# Altium PCB IDE_44m_to_44m.PcbDoc
Units mm, origin at the board's own origin, x right, y up, seen from the top; angles counter-clockwise.
Board outline 49.07 x 49.28 mm, 2 copper layers (Top Layer, Bottom Layer), stack 1.594 mm thick; 2 components, 35 nets, 88 pads, 53 vias.
Unrouted connection lines stored in the file: 36.
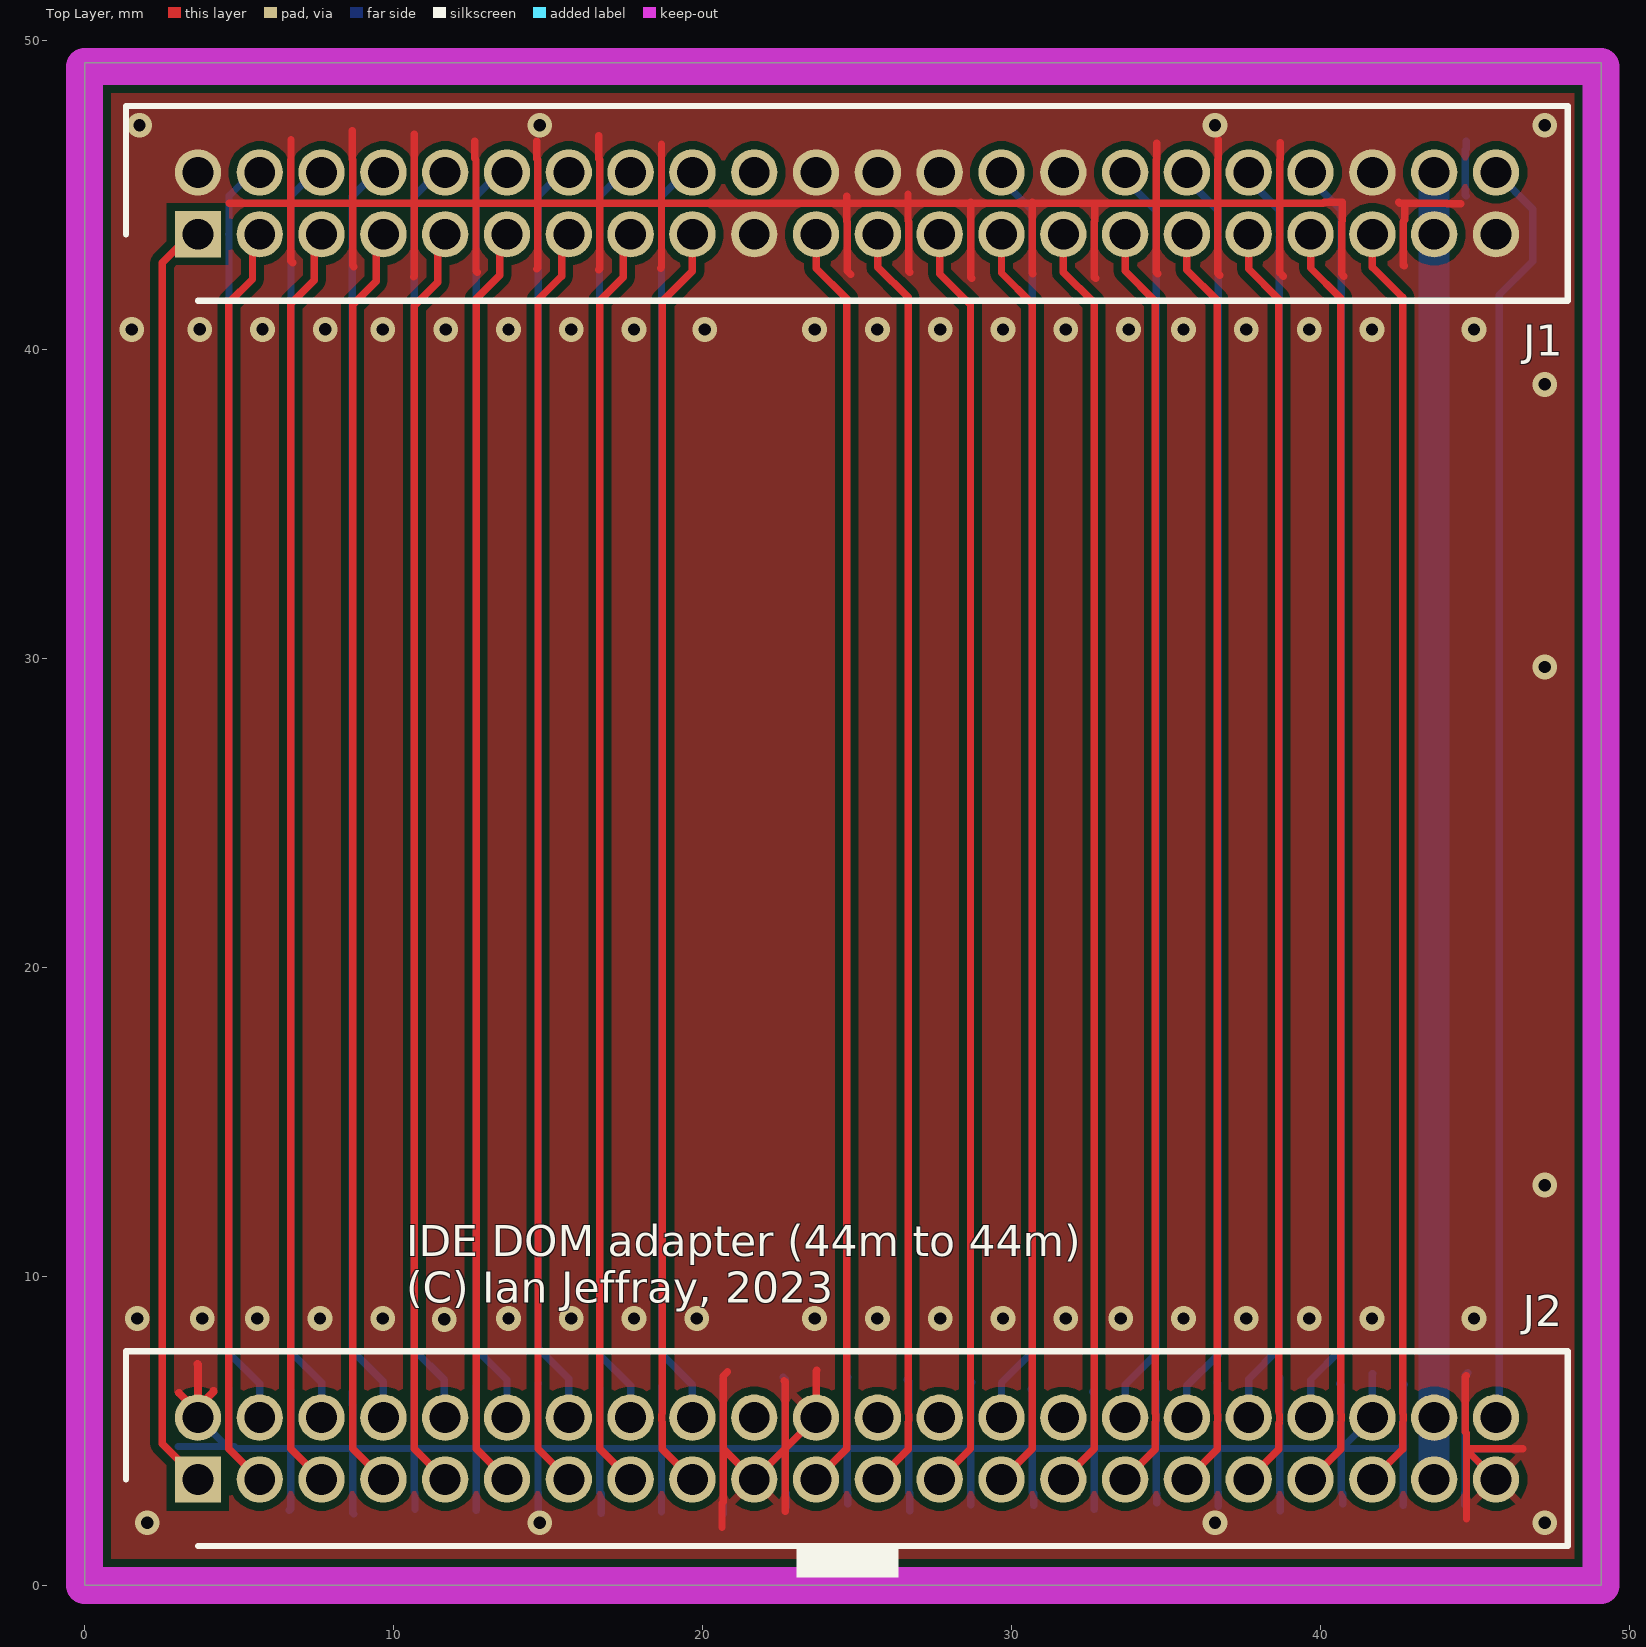
[diagram p0: Top Layer view]
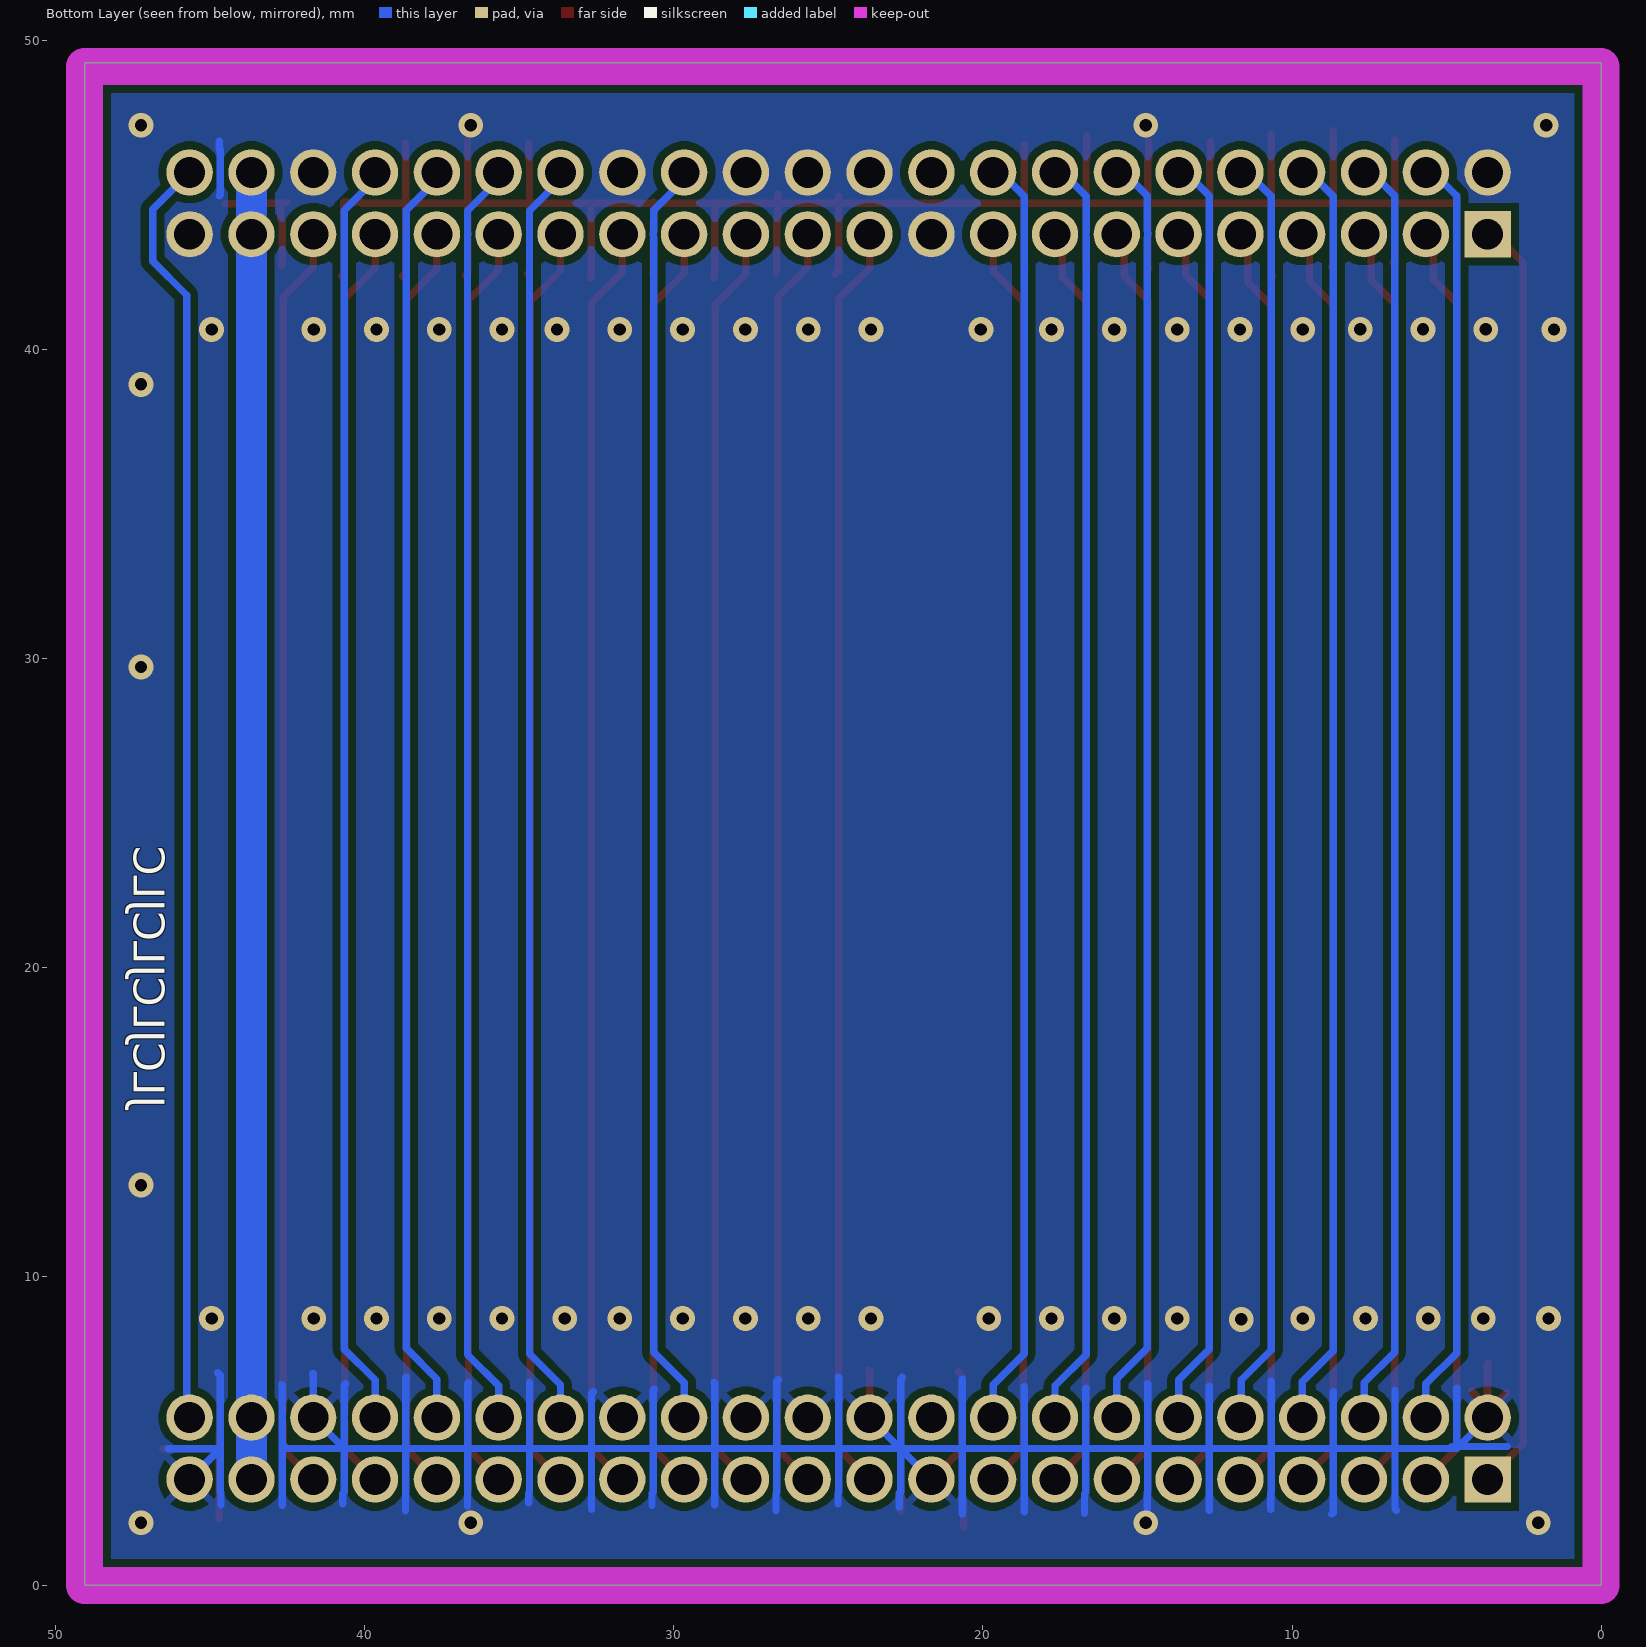
[diagram p1: Bottom Layer view, seen from below]

## Layer stack, top to bottom
Top Solder: solder mask 0.0102, Solder Resist, Dk 3.5
Top Layer: signal copper 0.035
Dielectric 1: dielectric 1.524, FR-4, Dk 4.8
Bottom Layer: signal copper 0.035
Bottom Solder: solder mask 0.0102, Solder Resist, Dk 3.5

## Board outline
0,49.276 49.069,49.276 49.069,0 0,0

## Design rules (kind name [scope] priority, off if disabled: settings)
Clearance [All] p1: gap=0.254 ignorepadtopadclearanceinfootprint=FALSE except(0: Arc-Hole Track-Hole SMDPad-Hole THPad-Hole Via-Hole Fill-Hole Poly-Hole Region-Hole Text-Hole; 0.127: Arc-Arc Arc-Track Arc-THPad Track-Track Track-THPad)
ComponentClearance [All] p1: gap=0.127 collisioncheckmode=3 verticalgap=0.254 showdistances=FALSE
PolygonConnect [All] p1: connectstyle=Direct reliefconductorwidth=0.254 reliefentries=4 polygonreliefangle="90 Angle" airgapwidth=0.254
RoutingVias [All] p1: holewidth=0.711 width=1.27 viastyle="Through Hole" minholewidth=0.711 minwidth=1.27 maxholewidth=0.711 maxwidth=1.27
SolderMaskExpansion [All] p1: expansion=0.102 istentingtop=FALSE
Width [All] p1: maxlimit=0.254 minlimit=0.127 preferedwidth=0.254 minimp=50.000000 maximp=50.000000 favimp=50.000000
29 further rules are at their usual default settings.

## Classes and differential pairs
component class IDE_44m_to_44m: J11

## Components (designator, comment, footprint, x,y, rotation, side; value= is the part's Value field where it differs from the comment)
J1 "87831-4420" SHDR44W55P200_2X22_4665X630X640P 3.669,43.72 r0 top locked value="44pin male 2mm"
J2 "87831-4420" SHDR44W55P200_2X22_4665X630X640P 3.669,3.429 r0 top locked value="44pin male 2mm"

## Footprints (in the part's own frame and the unit in brackets; to place one, negate y for a bottom-side part, rotate by r counter-clockwise, add the part's x,y. Pads: shape width x height; smd on the part's side, far side on the other; paste and mask are expansions set on the pad)
SHDR44W55P200_2X22_4665X630X640P [mm]
  rect 1.5x1.5 hole 1: 1(0,0)
  round 1.5 hole 1: 2(0,2) 3(2,0) 4(2,2) 5(4,0) 6(4,2) 7(6,0) 8(6,2) 9(8,0) 10(8,2) 11(10,0) 12(10,2) 13(12,0) 14(12,2) 15(14,0) 16(14,2) 17(16,0) 18(16,2) 19(18,0) 20(18,2) 21(20,0) 22(20,2) 23(22,0) 24(22,2) 25(24,0) 26(24,2) 27(26,0) 28(26,2) 29(28,0) 30(28,2) 31(30,0) 32(30,2) 33(32,0) 34(32,2) 35(34,0) 36(34,2) 37(36,0) 38(36,2) 39(38,0) 40(38,2) 41(40,0) 42(40,2) 43(42,0) 44(42,2)
  silkscreen extent -2.32,-2.15 44.32,4.15, body extent -2.32,-2.15 44.33,4.15, height 6.2

## Part data
J1 J2: "Drive connector", Manufacturer_Name=Molex, Mouser Part Number=538-87831-4420, Datasheet Link=https://datasheet.datasheetarchive.com/originals/distributors/Datasheets-DGA22/2095109.pdf, Height=6.4mm, Manufacturer_Part_Number=87831-4420, Mouser Price/Stock=https://www.mouser.co.uk/ProductDetail/Molex/87831-4420?qs=tYx%252BZc2nXqqGnHzye8Wn9w%3D%3D

## Via types
v1: diameter 0.8, hole 0.4, Top Layer to Bottom Layer, tented both sides, 53 vias

## Nets (pads, with @x,y where several pads share a name; then routed paths per layer and width w, separated by ;. In a path a pad name is that pad's centre, name@x,y a point inside that pad or via, vN(x,y) a via of type N, cw(c..) or ccw(c..) an arc to the next point about the centre after c; other vN are vias at no path point)
A0: J1.35 J2.35 | length 41.1
  Top Layer w0.24: J2.35 38.646,4.406 38.646,5.209 cw(c38.886,5.207) 38.65,5.25 ccw(c37.669,5.429) 38.65,5.609 cw(c38.886,5.651) 38.646,5.649 38.646,41.618 37.669,42.595 J1.35
A1: J1.33 J2.33 | length 41.1
  Top Layer w0.24: J2.33 36.646,4.406 36.646,5.209 cw(c36.886,5.207) 36.65,5.25 ccw(c35.669,5.429) 36.65,5.609 cw(c36.886,5.651) 36.646,5.649 36.646,41.586 35.669,42.563 J1.33
A2: J1.36 J2.36 | length 41.2
  Bottom Layer w0.24: J1.36@37.434,45.72 38.659,44.495 38.659,43.84 cw(c37.669,43.72) 38.659,43.6 38.659,7.671 37.669,6.681 J2.36
ACTIVEn: J1.39 J2.39 | length 41.1
  Top Layer w0.24: J2.39 42.646,4.406 42.646,5.209 cw(c42.886,5.207) 42.65,5.25 ccw(c41.669,5.429) 42.65,5.609 cw(c42.886,5.651) 42.646,5.649 42.646,41.682 41.669,42.659 J1.39
ALE: J1.28 J2.28 | length 41.2
  Bottom Layer w0.24: J1.28@29.434,45.72 30.658,44.496 30.658,43.848 cw(c29.669,43.72) 30.658,43.592 30.658,7.544 29.669,6.555 J2.28
CS0n: J1.37 J2.37 | length 41.1
  Top Layer w0.24: J2.37 40.646,4.406 40.646,5.209 cw(c40.886,5.207) 40.65,5.25 ccw(c39.669,5.429) 40.65,5.609 cw(c40.886,5.651) 40.646,5.649 40.646,41.65 39.669,42.627 J1.37
CS1n: J1.38 J2.38 | length 41.2
  Bottom Layer w0.24: J1.38@39.434,45.72 40.595,44.559 40.665,44.489 40.665,43.755 cw(c39.669,43.72) 40.665,43.685 40.665,7.645 39.669,6.649 J2.38
D0: J1.17 J2.17 | length 41.1
  Top Layer w0.24: J2.17 18.692,4.406 18.692,5.207 ccw(c18.452,5.207) 18.688,5.252 cw(c19.669,5.429) 18.688,5.609 ccw(c18.452,5.651) 18.692,5.651 18.692,41.552 19.669,42.529 J1.17
D1: J1.15 J2.15 | length 41
  Top Layer w0.24: J1.15@17.434,43.72 17.434,42.326 16.672,41.564 16.672,4.426 J2.15
D2: J1.13 J2.13 | length 41
  Top Layer w0.24: J1.13@15.434,43.72 15.434,42.358 14.672,41.596 14.672,4.426 J2.13
D3: J1.11 J2.11 | length 41
  Top Layer w0.24: J1.11@13.434,43.72 13.434,42.39 12.672,41.628 12.672,4.426 J2.11
D4: J1.9 J2.9 | length 41
  Top Layer w0.24: J1.9@11.434,43.72 11.434,42.168 10.672,41.406 10.672,4.426 J2.9
D5: J1.7 J2.7 | length 41
  Top Layer w0.24: J1.7@9.434,43.72 9.434,42.2 8.672,41.438 8.672,4.426 J2.7
D6: J1.5 J2.5 | length 41
  Top Layer w0.24: J1.5@7.434,43.72 7.434,42.232 6.672,41.47 6.672,4.426 J2.5
D7: J1.3 J2.3 | length 41
  Top Layer w0.24: J1.3@5.434,43.72 5.434,42.264 4.672,41.502 4.672,4.426 J2.3
D8: J1.4 J2.4 | length 41
  Bottom Layer w0.24: J1.4@5.434,45.72 4.674,44.96 4.674,43.776 ccw(c5.669,43.72) 4.674,43.664 4.674,7.518 5.669,6.523 J2.4
D9: J1.6 J2.6 | length 41
  Bottom Layer w0.24: J1.6@7.434,45.72 6.68,44.966 6.68,43.848 ccw(c7.669,43.72) 6.68,43.592 6.68,7.544 7.669,6.555 J2.6
D10: J1.8 J2.8 | length 41
  Bottom Layer w0.24: J1.8@9.434,45.72 8.661,44.947 8.661,43.816 cw(c7.669,43.72) 8.661,43.624 8.661,7.595 9.669,6.587 J2.8
D11: J1.10 J2.10 | length 41
  Bottom Layer w0.24: J1.10@11.434,45.72 10.668,44.954 10.668,7.62 11.636,6.652 11.636,5.462 J2.10
D12: J1.12 J2.12 | length 41
  Bottom Layer w0.24: J1.12@13.434,45.72 12.675,44.961 12.675,43.792 ccw(c13.669,43.72) 12.675,43.648 12.675,7.645 13.669,6.651 J2.12
D13: J1.14 J2.14 | length 41
  Bottom Layer w0.24: J1.14@15.434,45.72 14.681,44.967 14.681,43.855 ccw(c15.669,43.72) 14.681,43.585 14.681,7.671 15.669,6.683 J2.14
D14: J1.16 J2.16 | length 41
  Bottom Layer w0.24: J1.16@17.434,45.72 16.662,44.948 16.662,43.805 cw(c15.669,43.72) 16.662,43.635 16.662,7.468 17.669,6.461 J2.16
D15: J1.18 J2.18 | length 41
  Bottom Layer w0.24: J1.18@19.434,45.72 18.669,44.955 18.669,7.493 19.669,6.493 J2.18
DMACKn: J1.29 J2.29 | length 41.1
  Top Layer w0.24: J2.29 32.666,4.426 32.666,41.502 31.671,42.497 31.671,43.718 J1.29
DMARQ: J1.21 J2.21 | length 41.1
  Top Layer w0.24: J2.21 24.666,4.426 24.666,41.628 23.669,42.625 J1.21
GND: J1.2 J1.19 J1.22 J1.24 J1.26 J1.30 J1.40 J1.43 J2.2 J2.19 J2.22 J2.24 J2.26 J2.30 J2.40 J2.43 | length 259.2
  Top Layer w0.24: 4.673,44.724 4.674,44.723 6.672,44.723 ; 6.68,46.787 6.68,46.141 6.672,46.133 6.672,44.723 ; 6.731,42.799 6.672,42.858 6.672,44.723 ; 8.661,47.066 8.661,46.138 8.672,46.127 8.672,44.723 ; 8.712,42.672 8.672,42.712 8.672,44.723 ; 10.643,42.342 10.668,42.367 10.668,44.723 ; 10.668,46.965 10.668,44.723 ; 12.624,46.736 12.624,46.175 12.666,46.133 12.666,44.723 ; 12.7,42.494 12.666,42.528 12.666,44.723 ; 14.63,42.596 14.666,42.631 14.666,44.723 ; 14.63,46.736 14.63,46.169 14.666,46.133 14.666,44.723 ; 16.637,42.57 16.666,42.599 16.666,44.723 ; 16.637,46.914 16.637,46.162 16.666,46.133 16.666,44.723 ; 18.644,42.621 18.669,42.647 18.669,44.723 ; 18.669,46.634 18.669,44.723 ; 20.625,1.877 20.625,2.667 20.672,2.714 20.672,4.426 ; 20.803,6.909 20.672,6.778 20.672,4.426 ; 22.631,6.629 22.666,6.595 22.666,4.426 ; 22.666,2.402 22.666,4.426 ; 23.698,6.96 23.669,6.93 J2.22 22.666,4.426 ; 24.663,44.958 24.663,44.723 ; 24.79,42.418 24.672,42.536 24.672,44.127 24.663,44.136 24.663,44.723 ; 26.645,45.009 26.645,44.723 ; 26.695,42.494 26.67,42.52 26.67,44.129 26.645,44.154 26.645,44.723 ; 28.677,44.755 28.677,44.723 ; 28.702,42.291 28.672,42.321 28.672,44.133 28.677,44.138 28.677,44.723 ; 30.658,44.755 30.658,44.723 ; 30.683,42.443 30.67,42.456 30.67,44.128 30.658,44.141 30.658,44.723 ; 32.69,44.653 32.69,44.151 32.672,44.133 32.672,42.334 32.715,42.291 ; 34.696,46.66 34.696,46.157 34.672,46.133 34.672,44.723 ; 34.722,42.443 34.672,42.493 34.672,44.723 ; 36.678,46.787 36.678,46.139 36.672,46.133 36.672,44.723 ; 36.728,42.393 36.672,42.449 36.672,44.723 ; 38.684,46.685 38.684,46.145 38.672,46.133 38.672,44.723 ; 38.786,42.367 38.672,42.481 38.672,44.723 ; 40.742,42.367 40.672,42.437 40.672,44.133 40.691,44.152 40.691,44.755 40.114,44.755 40.082,44.723 38.672,44.723 ; 42.52,44.755 42.551,44.723 44.076,44.723 44.095,44.704 44.526,44.704 ; 42.697,42.697 42.672,42.723 42.672,44.133 42.723,44.184 42.723,44.704 ; 44.704,6.782 44.672,6.75 44.672,4.978 44.716,4.934 44.716,4.42 ; 44.716,2.159 44.716,4.382 ; J2.43 44.716,4.382 ; 46.533,4.42 44.716,4.42 ; 6.672,44.723 8.672,44.723 ; 8.672,44.723 10.668,44.723 ; 10.668,44.723 12.666,44.723 ; 12.666,44.723 14.666,44.723 ; 14.666,44.723 16.666,44.723 ; 16.666,44.723 18.669,44.723 ; 18.669,44.723 24.663,44.723 ; 20.672,4.426 J2.19 22.666,4.426 ; 24.663,44.723 26.645,44.723 ; 26.645,44.723 28.677,44.723 ; 28.677,44.723 30.658,44.723 ; 30.658,44.723 34.672,44.723 ; 34.672,44.723 36.672,44.723 ; 36.672,44.723 38.672,44.723 ; 44.716,4.382 44.716,4.42
  Top Layer w0.254: 3.053,6.232 J2.2@3.669,5.616 ; 3.658,7.163 3.669,7.151 J2.2@3.669,5.766 ; J2.2 J2.2@3.669,5.616 ; 4.171,6.299 4.171,6.268 J2.2@3.669,5.766 ; J2.2@3.669,5.616 J2.2@3.669,5.766
  Bottom Layer w0.24: 3.026,4.495 4.603,4.495 ; J2.2 4.603,4.495 ; 4.674,6.375 4.674,5.844 4.666,5.836 4.666,4.495 ; 6.629,2.438 6.669,2.478 6.669,4.432 ; 6.669,6.325 6.669,4.432 ; 8.661,6.274 8.661,5.847 8.672,5.836 8.672,4.432 ; 8.712,2.311 8.672,2.352 8.672,4.432 ; 10.668,6.604 10.668,4.432 ; 10.693,2.464 10.693,2.995 10.668,3.02 10.668,4.432 ; 12.675,2.438 12.675,3.013 12.672,3.016 12.672,4.432 ; 12.675,6.452 12.672,6.449 12.672,4.432 ; 14.681,2.438 14.681,3.007 14.672,3.016 14.672,4.432 ; 14.681,6.528 14.672,6.519 14.672,4.432 ; 16.662,6.375 16.672,6.366 16.672,4.432 ; 16.713,2.337 16.713,2.975 16.672,3.016 16.672,4.432 ; 18.669,2.388 18.669,4.432 ; 18.669,6.426 18.669,4.432 ; 20.676,2.311 20.676,4.432 ; 20.676,6.68 20.672,6.677 20.672,4.496 20.676,4.492 20.676,4.432 ; J2.19 22.666,4.426 ; 22.606,6.731 22.666,6.671 22.666,4.432 ; 22.708,2.54 22.708,2.98 22.666,3.022 22.666,4.426 ; J2.22 22.672,4.432 ; 24.689,2.642 24.689,2.999 24.672,3.016 24.672,4.432 ; 24.689,6.731 24.672,6.714 24.672,4.432 ; 26.619,6.655 26.666,6.608 26.666,4.432 ; 26.695,2.413 26.695,2.993 26.666,3.022 26.666,4.432 ; 28.677,2.616 28.677,3.011 28.672,3.016 28.672,4.432 ; 28.702,6.579 28.672,6.549 28.672,4.432 ; 30.632,6.35 30.67,6.312 30.67,4.432 ; 30.709,2.591 30.709,2.979 30.67,3.018 30.67,4.432 ; 32.614,6.274 32.666,6.221 32.666,4.432 ; 32.664,2.464 32.664,3.014 32.666,3.016 32.666,4.432 ; 34.671,6.579 34.671,4.432 ; 34.696,2.667 34.696,2.992 34.671,3.017 34.671,4.432 ; 36.652,6.553 36.666,6.539 36.666,4.432 ; 36.678,2.565 36.678,3.01 36.666,3.022 36.666,4.432 ; 38.659,6.731 38.671,6.718 38.671,4.432 ; 38.684,2.413 38.684,3.004 38.671,3.017 38.671,4.432 ; 40.615,6.528 40.666,6.476 40.666,4.432 ; 40.716,2.642 40.716,2.972 40.666,3.022 40.666,4.432 ; 41.681,6.858 41.669,6.846 J2.40 40.672,4.432 ; 42.672,2.591 42.672,4.573 ; 42.697,6.502 42.672,6.477 42.672,4.573 ; 44.653,2.616 44.653,3.003 44.672,3.022 44.672,4.42 ; 44.704,44.958 44.672,44.99 44.672,46.45 44.704,46.482 44.704,46.736 ; 44.755,6.883 44.672,6.801 44.672,4.42 ; J2.43 44.678,4.42 ; 46.362,4.421 44.68,4.421 44.678,4.42 ; 4.603,4.495 4.666,4.432 ; 4.603,4.495 4.666,4.495 ; 4.666,4.432 4.666,4.495 ; 4.666,4.432 4.902,4.432 ; 4.666,4.495 4.839,4.495 4.902,4.432 ; 4.902,4.432 6.669,4.432 ; 6.669,4.432 8.672,4.432 ; 8.672,4.432 10.668,4.432 ; 10.668,4.432 12.672,4.432 ; 12.672,4.432 14.672,4.432 ; 14.672,4.432 16.672,4.432 ; 16.672,4.432 18.669,4.432 ; 18.669,4.432 20.676,4.432 ; 20.676,4.432 22.666,4.432 ; 22.666,4.426 22.672,4.432 ; 22.666,4.426 22.666,4.432 ; 22.666,4.432 22.672,4.432 ; 22.672,4.432 24.672,4.432 ; 24.672,4.432 26.666,4.432 ; 26.666,4.432 28.672,4.432 ; 28.672,4.432 30.67,4.432 ; 30.67,4.432 32.666,4.432 ; 32.666,4.432 34.671,4.432 ; 34.671,4.432 36.666,4.432 ; 36.666,4.432 38.671,4.432 ; 38.671,4.432 40.666,4.432 ; 40.666,4.432 40.672,4.432 ; 40.672,4.432 42.531,4.432 42.672,4.573 ; 44.672,4.42 44.678,4.42
  other v1: 2.032,2.032 14.732,2.032 36.576,2.032 47.244,2.032 11.642,8.609 1.702,8.636 3.81,8.636 5.588,8.636 7.62,8.636 9.652,8.636 13.716,8.636 15.748,8.636 17.78,8.636 19.812,8.636 23.622,8.636 25.654,8.636 27.686,8.636 29.718,8.636 31.75,8.636 33.528,8.636 35.56,8.636 37.592,8.636 39.624,8.636 41.656,8.636 44.958,8.636 47.244,12.954 47.244,29.718 47.244,38.862 1.524,40.64 3.728,40.641 5.76,40.641 7.792,40.641 9.652,40.64 11.684,40.64 13.716,40.64 15.748,40.64 17.78,40.64 20.066,40.64 23.622,40.64 25.654,40.64 27.686,40.64 29.718,40.64 31.75,40.64 33.782,40.64 35.56,40.64 37.592,40.64 39.624,40.64 41.656,40.64 44.958,40.64 1.778,47.244 14.732,47.244 36.576,47.244 47.244,47.244
IO_CH_RDY: J1.27 J2.27 | length 41.1
  Top Layer w0.24: J2.27 30.666,4.426 30.666,41.47 29.669,42.467 J1.27
IOCS16n: J1.32 J2.32 | length 41.2
  Bottom Layer w0.24: J1.32@33.434,45.72 34.671,44.483 34.671,7.493 33.669,6.491 J2.32
IORn: J1.25 J2.25 | length 41.1
  Top Layer w0.24: J2.25 28.666,4.426 28.666,41.438 27.669,42.435 J1.25
IOWn: J1.23 J2.23 | length 41.1
  Top Layer w0.24: J2.23 26.646,4.406 26.646,5.209 cw(c26.886,5.207) 26.65,5.25 ccw(c25.669,5.429) 26.65,5.609 cw(c26.886,5.651) 26.646,5.649 26.646,41.68 25.669,42.657 J1.23
IRQr: J1.31 J2.31 | length 41.1
  Top Layer w0.24: J2.31 34.646,4.406 34.646,5.209 cw(c34.886,5.207) 34.65,5.25 ccw(c33.669,5.429) 34.65,5.609 cw(c34.886,5.651) 34.646,5.649 34.646,41.554 33.669,42.531 J1.31
PDIAGn: J1.34 J2.34 | length 41.2
  Bottom Layer w0.24: J1.34@35.434,45.72 36.678,44.476 36.678,43.826 ccw(c37.669,43.72) 36.678,43.614 36.678,7.468 35.669,6.459 J2.34
RESETn: J1.1 J2.1 | length 41.1
  Top Layer w0.24: J1.1@3.434,43.72 2.515,42.801 2.515,4.583 J2.1
Type: J1.44 J2.44 | length 41.3
  Bottom Layer w0.24: J2.44 45.768,5.528 45.768,41.755 46.863,42.85 46.863,43.137 46.863,44.526 J1.44
VCC: J1.41 J1.42 J2.41 J2.42 | length 42.3
  Bottom Layer w1: J2.41 J2.42 J1.42
pads on no net: J1.20 J2.20

## Polygon pours and split planes (outlines as drawn)
GND on Bottom Layer "GND" (solid, remove dead copper, pour order 0): 0,0 49.069,0 49.069,49.276 0,49.276
GND on Top Layer "GND" (solid, remove dead copper, pour order 4): 0.172,0 49.022,0 49.022,49.276 0,49.276

## Keep-outs
Keep-Out Layer:
  lines w1.2: 0,0 0,49.149 49.069,49.149 49.069,0 0,0

## Silkscreen, mask and mechanical layers (free items; w line width, h text height)
Top Overlay:
  rectangle: 23.034,0.254 26.336,1.27
  text "IDE DOM adapter (44m to 44m) / (C) Ian Jeffray, 2023" at 10.414,9.144 h1
Bottom Overlay:
  text "JLCJLCJLCJLC" at 47.472,15.44 h1 r90
Shape:
  the board outline again, w1.2